# Altium PCB PCB1.PcbDoc
Units mm, origin at the board's own origin, x right, y up, seen from the top; angles counter-clockwise.
Board outline 60 x 50 mm, 2 copper layers (Top Layer, Bottom Layer); 19 components, 23 nets, 76 pads, 17 vias.
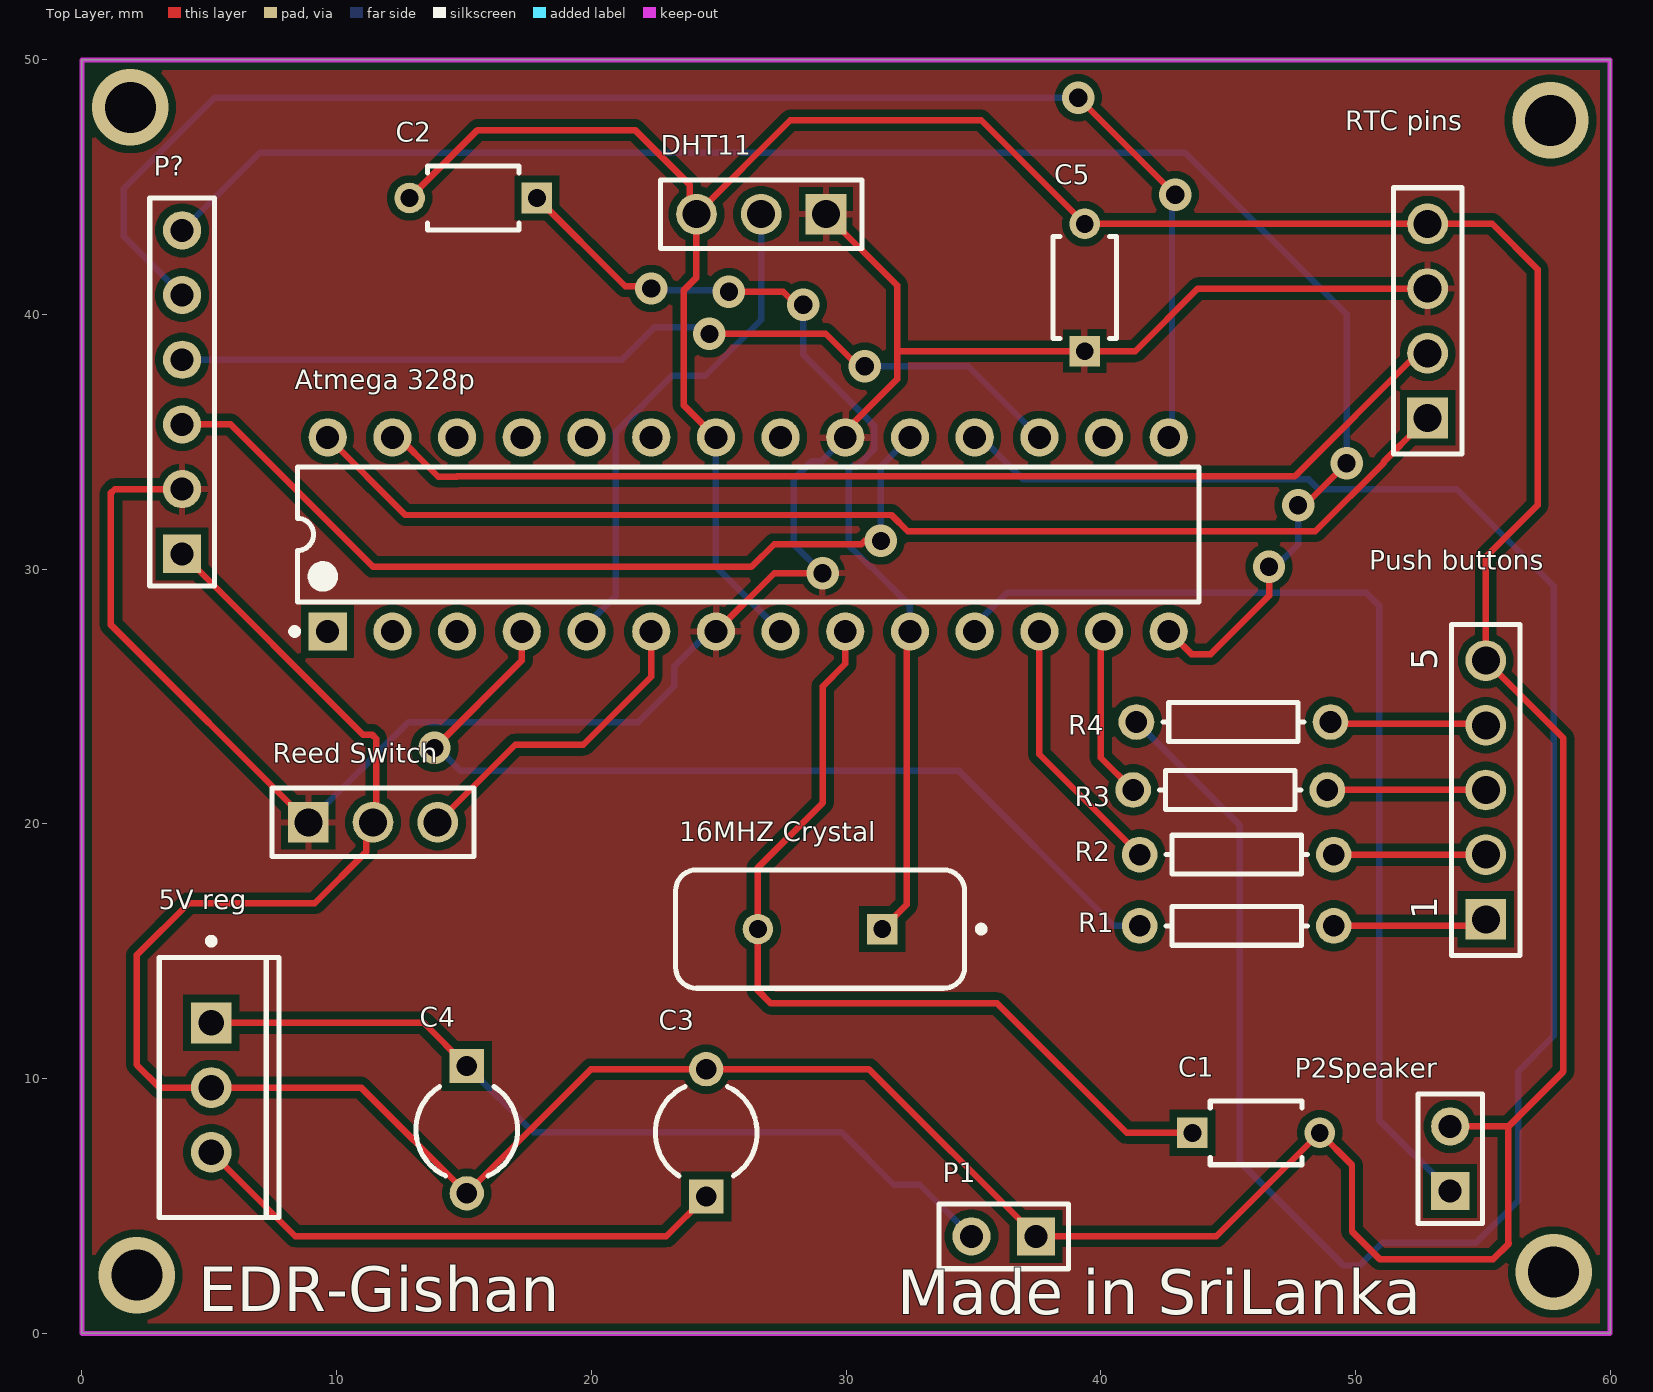
[diagram p0: Top Layer view]
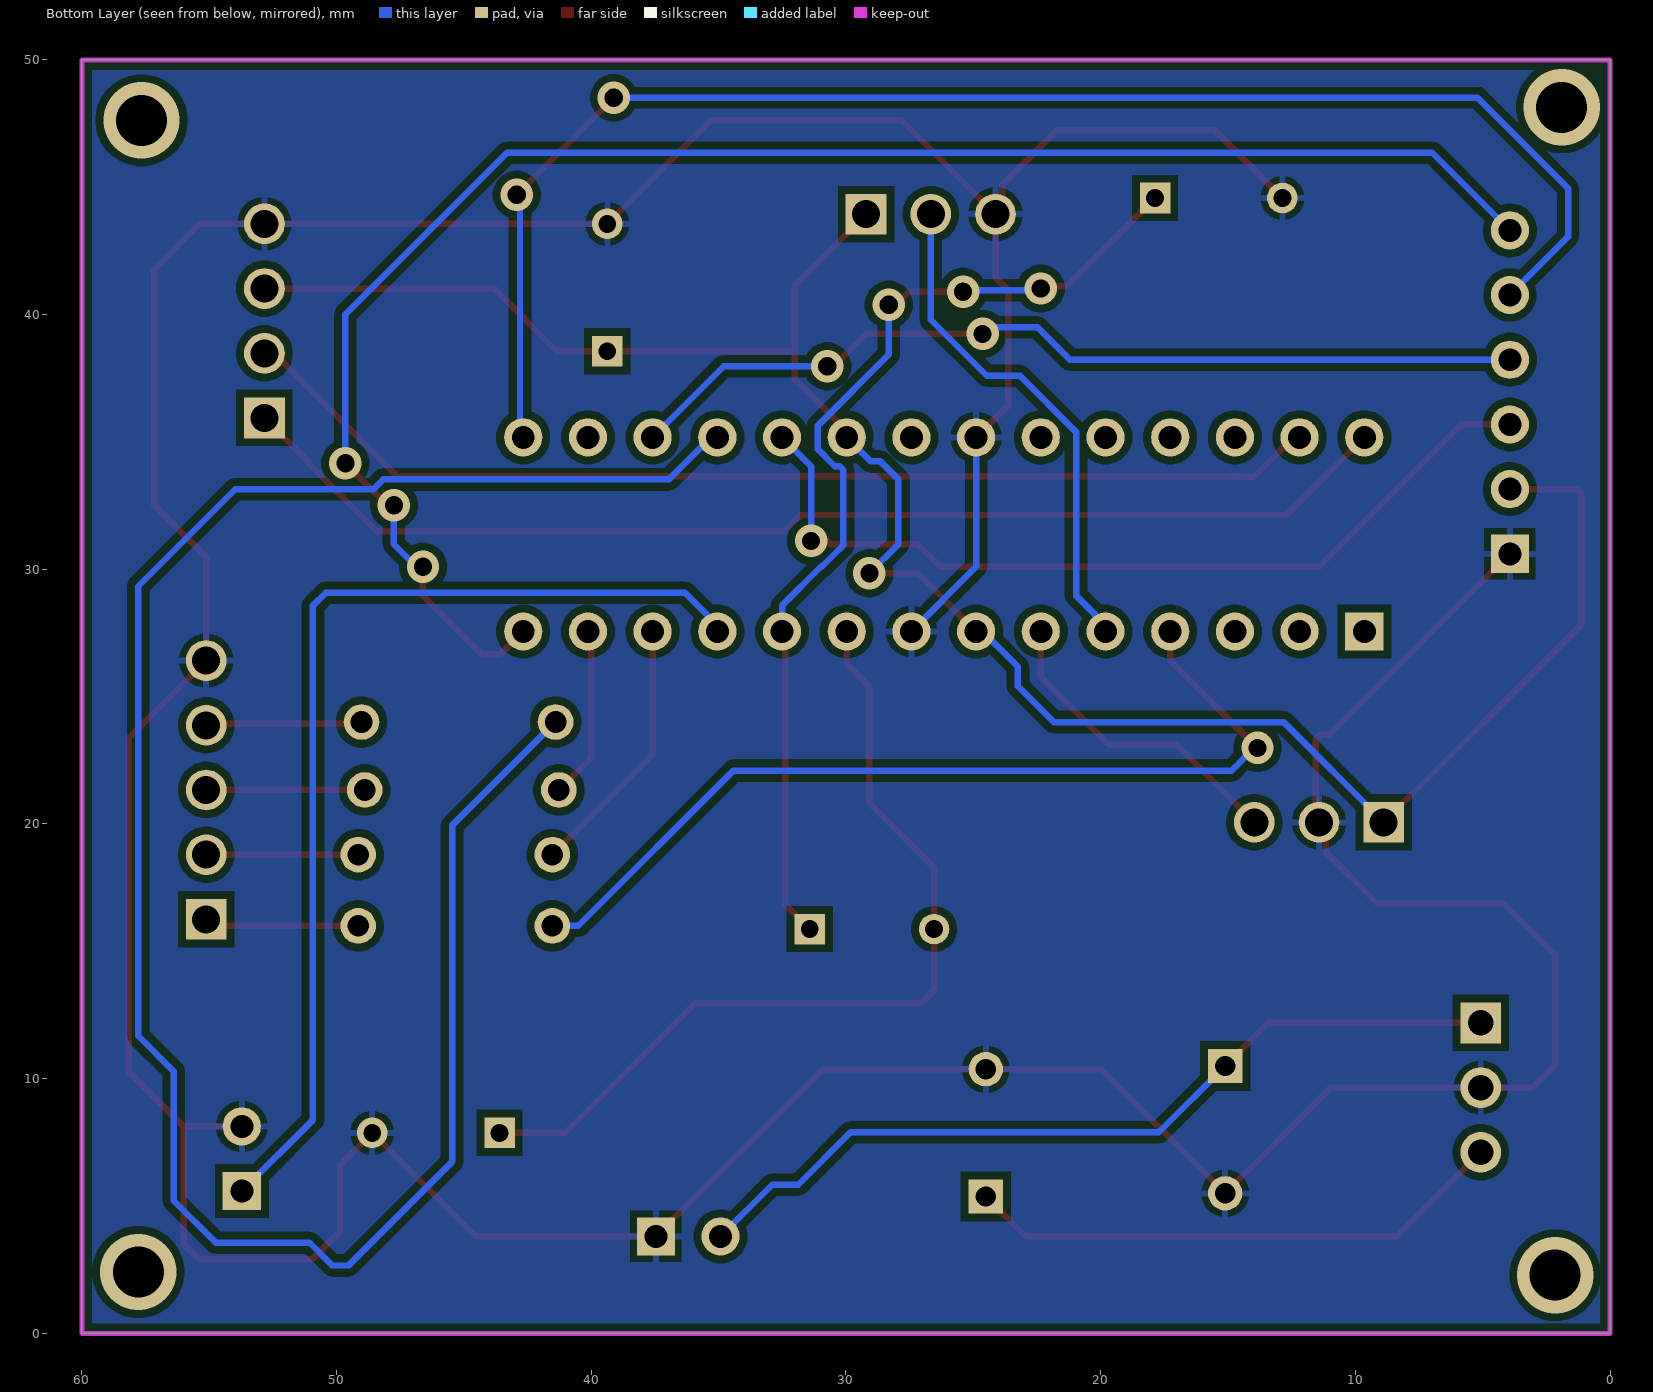
[diagram p1: Bottom Layer view, seen from below]

## Layer stack, top to bottom
Top Solder: solder mask 0.0102, Solder Resist, Dk 3.5
Top Layer: signal copper 0.0356
Dielectric 1: dielectric 0.32, FR-4, Dk 4.8
Bottom Layer: signal copper 0.0356
Bottom Solder: solder mask 0.0102, Solder Resist, Dk 3.5

## Board outline
0,0 60,0 60,50 0,50

## Design rules (kind name [scope] priority, off if disabled: settings)
Clearance "Polygon clearance" [InPolygon] p1: gap=0.3 ignorepadtopadclearanceinfootprint=FALSE except(0: Arc-Text Arc-Hole Track-Text Track-Hole SMDPad-Text SMDPad-Hole THPad-Text THPad-Hole Via-Text Via-Hole Fill-Text Fill-Hole Poly-Text Poly-Hole Region-Text Region-Hole Text-Text Text-Hole; 0.254: Arc-Arc Arc-Track Arc-SMDPad Arc-THPad Arc-Via Track-Track Track-SMDPad Track-THPad Track-Via SMDPad-SMDPad SMDPad-THPad SMDPad-Via THPad-THPad THPad-Via Via-Via)
Clearance [OnLayer('Top Solder') vs OnLayer('Top Overlay')] p2: gap=0.254 ignorepadtopadclearanceinfootprint=FALSE except(0: Arc-Text Arc-Hole Track-Text Track-Hole SMDPad-Text SMDPad-Hole THPad-Text THPad-Hole Via-Text Via-Hole Fill-Text Fill-Hole Poly-Text Poly-Hole Region-Text Region-Hole Text-Text Text-Hole)
PolygonConnect [All] p1: connectstyle=Relief reliefconductorwidth=0.254 reliefentries=4 polygonreliefangle="90 Angle" airgapwidth=0.254
RoutingVias [All] p1: holewidth=0.711 width=1.27 viastyle="Through Hole" minholewidth=0.711 minwidth=1.27 maxholewidth=0.711 maxwidth=1.27
SilkToSolderMaskClearance [IsPad] p1: minsilkscreentomaskgap=0.1 clearancetoexposedcopper=TRUE
SolderMaskExpansion [All] p1: expansion=0.102 istentingtop=FALSE
Width [All] p1: maxlimit=0.254 minlimit=0.254 preferedwidth=0.254
29 further rules are at their usual default settings.

## Components (designator, comment, footprint, x,y, rotation, side; value= is the part's Value field where it differs from the comment)
"5V reg" "LM7805CT" FAIR-TO-220-3 5.08,9.652 r0 top
"16MHZ Crystal" "FOXSLF/160-20" FOX-FOXSLF160-20 28.983,15.875 r180 top
"Atmega 328p" "ATmega328-PU" 28P3 26.162,31.369 r90 top
C1 "RCE5C1H220J0K1H03B" FP-RCE0K1-MFG 46.101,7.874 r0 top
C2 "RCE5C1H220J0K1H03B" FP-RCE0K1-MFG 15.367,44.577 r180 top
C3 "Cap2" CAPR5-4X5 24.511,7.874 r90 top value=100pF
C4 "Cap2" CAPR5-4X5 15.113,8.001 r270 top value=100pF
C5 "RDER71H104K0M1H03A" FP-RDE0M1-MFG 39.37,41.061 r90 top
DHT11 "61300311121" 61300311121 26.67,43.942 r180 top
P1 "Header 2" HDR1X2 37.465,3.81 r180 top
P2Speaker "Header 2" HDR1X2 53.721,5.588 r90 top
P? "Header 6" HDR1X6 3.937,30.607 r90 top
"Push buttons" "61300511121" 61300511121 55.118,21.336 r90 top
R1 "Res1" AXIAL-0.3 45.339,16.002 r0 top value=1K
R2 "Res1" AXIAL-0.3 45.339,18.796 r0 top value=1K
R3 "Res1" AXIAL-0.3 45.085,21.336 r0 top value=1K
R4 "1K" AXIAL-0.3 45.212,24.003 r0 top
"Reed Switch" "61300311121" 61300311121 11.43,20.066 r0 top
"RTC pins" "61300411121" 61300411121 52.832,39.751 r90 top

## Footprints (in the part's own frame and the unit in brackets; to place one, negate y for a bottom-side part, rotate by r counter-clockwise, add the part's x,y. Pads: shape width x height; smd on the part's side, far side on the other; paste and mask are expansions set on the pad)
28P3 [mm] "28-Pin Plastic Dual In-Line Package (PDIP)"
  rect 1.5x1.5 hole 0.9: 1(-3.81,16.51)
  round 1.5 hole 0.9: 2(-3.81,13.97) 3(-3.81,11.43) 4(-3.81,8.89) 5(-3.81,6.35) 6(-3.81,3.81) 7(-3.81,1.27) 8(-3.81,-1.27) 9(-3.81,-3.81) 10(-3.81,-6.35) 11(-3.81,-8.89) 12(-3.81,-11.43) 13(-3.81,-13.97) 14(-3.81,-16.51) 15(3.81,-16.51) 16(3.81,-13.97) 17(3.81,-11.43) 18(3.81,-8.89) 19(3.81,-6.35) 20(3.81,-3.81) 21(3.81,-1.27) 22(3.81,1.27) 23(3.81,3.81) 24(3.81,6.35) 25(3.81,8.89) 26(3.81,11.43) 27(3.81,13.97) 28(3.81,16.51)
  silkscreen extent -3.93,-17.7 2.65,17.93, body extent -3.6,-17.65 3.6,17.65, height 4.58
61300311121 [mm] "Pin Header, pitch 2.54 mm, THT, Vertical, single row, 3p"
  rect 1.6x1.6 hole 1.1: 1(-2.54,0)
  round 1.6 hole 1.1: 2(0,0) 3(2.54,0)
  silkscreen extent -3.96,-1.35 3.96,1.35, body extent -3.81,-1.27 3.81,1.27, height 8.57
61300411121 [mm] "Pin Header, pitch 2.54 mm, THT, Vertical, single row, 4p"
  rect 1.6x1.6 hole 1.1: 1(-3.81,0)
  round 1.6 hole 1.1: 2(-1.27,0) 3(1.27,0) 4(3.81,0)
  silkscreen extent -5.23,-1.35 5.23,1.35, body extent -5.08,-1.27 5.08,1.27, height 8.57
61300511121 [mm] "Pin Header, pitch 2.54 mm, THT, Vertical, single row, 5p"
  rect 1.6x1.6 hole 1.1: 1(-5.08,0)
  round 1.6 hole 1.1: 2(-2.54,0) 3(0,0) 4(2.54,0) 5(5.08,0)
  silkscreen extent -6.5,-1.35 6.5,1.35, body extent -6.35,-1.27 6.35,1.27, height 8.57
AXIAL-0.3 [mm] "Axial Device, Thru-Hole; 2 Leads; 0.3 in Pin Spacing"
  round 1.4 hole 0.85: 1(-3.81,0) 2(3.81,0)
  silkscreen extent -2.77,-0.76 2.77,0.76
CAPR5-4X5 [mm] "Capacitor; 2 Leads"
  rect 1.35x1.35 hole 0.8: 1(-2.5,0)
  round 1.35 hole 0.8: 2(2.5,0)
  silkscreen extent -1.69,-2 1.82,2
FAIR-TO-220-3 [mm] "FM, 3-Leads, Body 10.2x4.7mm, Pitch 2.54mm"
  rect 1.6x1.6 hole 1: 1(0,2.54)
  round 1.6 hole 1: 2(0,0) 3(0,-2.54)
  silkscreen extent -2.04,-5.1 2.66,5.87, body extent -2.04,-5.1 2.66,5.1, height 18.95
FOX-FOXSLF160-20 [mm] "THD, 2-Leads, Body 11.35x4.65mm"
  rect 1.2x1.2 hole 0.7: 1(-2.44,0)
  round 1.2 hole 0.7: 2(2.44,0)
  silkscreen extent -6.45,-2.32 5.68,2.32, body extent -5.67,-2.32 5.68,2.33, height 3.6
FP-RCE0K1-MFG [mm]
  rect 1.2x1.2 hole 0.7 paste-1000 mask+0: 1(-2.5,0)
  round 1.2 hole 0.7 paste-1000 mask+0: 2(2.5,0)
  silkscreen extent -1.8,-1.25 1.8,1.25, body extent -3.2,-1.35 3.2,1.35, height 0.25
FP-RDE0M1-MFG [mm]
  rect 1.2x1.2 hole 0.7 paste-1000 mask+0: 1(-2.5,0)
  round 1.2 hole 0.7 paste-1000 mask+0: 2(2.5,0)
  silkscreen extent -2,-1.25 2,1.25, body extent -3.2,-1.35 3.2,1.35, height 0.25
HDR1X2 [mm] "Connector; Header; 2 Position"
  rect 1.5x1.5 hole 0.9: 1(0,0)
  round 1.5 hole 0.9: 2(2.54,0)
  silkscreen extent -1.27,-1.27 3.81,1.27
HDR1X6 [mm] "Connector; Header; 6 Position"
  rect 1.5x1.5 hole 0.9: 1(0,0)
  round 1.5 hole 0.9: 2(2.54,0) 3(5.08,0) 4(7.62,0) 5(10.16,0) 6(12.7,0)
  silkscreen extent -1.27,-1.27 13.97,1.27

## Part data
"5V reg": library part CMP-2000-04938-1, "Positive Voltage Regulator, 5 V, 1 A, -40 to 125 degC, 3-Pin TO-220, RoHS, Tube", Manufacturer=FairchildSemiconductor, Maximum Input Voltage=35V, Maximum Output Current=2.2(Typ)A, Maximum Quiescent Current=8mA, Operating Temperature=-40to125degC, Output Voltage=5V, Package=3TO-220AB, Package Description="3-Pin Through Hole Device, Body 10 x 4.5 mm, Pitch 2.54 mm", Package Reference=TO-220, Typical Dropout Voltage @ Current=2@1AV, Accuracy=±4%, Category=LinearRegulator, Datasheet URL=https://datasheet.ciiva.com/26904/lm7805ct-26904988.pdf, Datasheet Version=Aug-12, Line Regulation=100mV, Load Regulation=100mV, Manufacturer URL=https://www.fairchildsemi.com/, Mounting=ThroughHole, Number of Outputs=1, Output Type=Fixed, Package URL=https://www.fairchildsemi.com/package-drawings/TO/TO220B03.pdf, Packaging=Rail/Tube, Polarity=Positive, Rad Hard=No, Type=Linear
"16MHZ Crystal": library part CMP-1749-00003-1, "Resistance Weld Thru-Hole Crystal, 16 MHz, -20 to 70 degC, 2-Pin THD, RoHS, Bulk", Case\Package=Axial, Max Operating Temperature="155 degC", Min Operating Temperature="-55 degC", Package Quantity=200, Power Rating="250 mW", Resistance="221 kohm", Tolerance=1%, Voltage Rating="250 V", ComponentLink1Description="Manufacturer URL", ComponentLink1URL=http://www.foxonline.com/, ComponentLink2Description=Datasheet, ComponentLink2URL=http://www.foxonline.com/pdfs/hc49slf.pdf, DatasheetVersion=Mar-15, Length="0.248 inch", Mount="Through Hole", PackageDescription="2-Pin Through Hole Device, Body 11.35 x 4.65 mm", PackageReference=FOXSLF160-20, Packaging=Bulk, RoHSCompliant=true
"Atmega 328p": library part CMP-0095-00015-2, "8-bit AVR Microcontroller, 32KB Flash, 1KB EEPROM, 2KB SRAM, 28-pin PDIP, Industrial Grade (-40°C to 85°C)", ComponentLink1Description="Manufacturer URL", ComponentLink1URL=http://www.atmel.com/, ComponentLink2Description="ATmega48A/48PA/88A/88PA/168A/168PA/328/328P Datasheet", ComponentLink2URL=http://www.atmel.com/dyn/resources/prod_documents/8271.pdf, ComponentLink3Description="ATmega48A/48PA/88A/88PA/168A/168PA/328/328P Summary", ComponentLink3URL=http://www.atmel.com/dyn/resources/prod_documents/8271S.pdf, DatasheetVersion="revD, May-2011", PackageDescription="28-lead (0.300\"/7.62mm Wide) Plastic Dual Inline Package (PDIP)", PackageReference=28P3, PackageVersion="revB, Sep-2001", RevisionNote="DatasheetVersion updated. URLs added."
C1 C2: library part CMP-06035-047580-1, "Cap Ceramic 22pF 50V C0G ±5% Radial 5mm +125°C Automotive Bulk", Capacitance=22pF, Case/Package=Radial, Dielectric=C0G, Max Operating Temperature=125°C, Min Operating Temperature=-55°C, Package Quantity=500, Ratings=AEC-Q200, Resistor Type=Ceramic, Tolerance=5%, Voltage Rating=50V, Height=3.5mm, Height - Seated (Max)=0.138inch, Lead Diameter=0.5mm, Lead Pitch=0.197inch, Lead/Base Style="Formed Leads", Length=0.142inch, Mount="Through Hole", Packaging=Bulk, Termination=Radial, Voltage Rating (DC)=50V, Width=0.098inch
C3 C4: "Capacitor", PackageDescription="Capacitor; 2 Leads", PackageReference=CAPR5-4X5, Published=23-Sep-2002, Publisher="Altium Limited"
C5: library part CMP-06035-051680-1, "Ceramic Capacitor 100nF ±10% 50V X7R Radial", Capacitance=100nF, Case/Package=Radial, Dielectric=X7R, Max Operating Temperature=125°C, Min Operating Temperature=-55°C, Package Quantity=2000, Resistor Type=Ceramic, Tolerance=10%, Voltage Rating=50V, Height=3.5mm, Height - Seated (Max)=0.236inch, Lead Diameter=0.5mm, Lead Free="Lead Free", Lead Pitch=0.197inch, Lead/Base Style=Kinked, Length=0.157inch, Mount="Through Hole", Packaging="Tape and Reel", Termination=Radial, Voltage Rating (DC)=50V, Width=3.5mm
DHT11 "Reed Switch": library part CMP-1502-01062-1, "THT Vertical Pin Header WR-PHD, Pitch 2.54 mm, Single Row, 3 pins", Contact Resistance=20mOhm, Manufacturer="Wurth Elektronik", Operating Temperature=-40to105degC, Rated Current=3A, Withstanding Voltage=500VAC, Working Voltage=250VAC, Datasheet URL=https://katalog.we-online.de/em/datasheet/6130xx11121.pdf, Gender=Male, Manufacturer URL=http://www.we-online.de, Mounting Technology=THT, Orientation=Vertical, Package Reference=61300311121, Packaging=Bag, Part Number=61300311121, Pin Number=3, Pitch=2.54mm, Publisher=WurthElektronik, Row Number=Single
P1 P2Speaker: "Header, 2-Pin", LatestRevisionDate=17-Jul-2002, LatestRevisionNote="Re-released for DXP Platform.", Publisher="Altium Limited"
P?: "Header, 6-Pin", LatestRevisionDate=17-Jul-2002, LatestRevisionNote="Re-released for DXP Platform.", Publisher="Altium Limited"
"Push buttons": library part CMP-1502-01068-1, "THT Vertical Pin Header WR-PHD, Pitch 2.54 mm, Single Row, 5 pins", Contact Resistance=20mOhm, Manufacturer="Wurth Elektronik", Operating Temperature=-40to105degC, Rated Current=3A, Withstanding Voltage=500VAC, Working Voltage=250VAC, Datasheet URL=https://katalog.we-online.de/em/datasheet/6130xx11121.pdf, Gender=Male, Manufacturer URL=http://www.we-online.de, Mounting Technology=THT, Orientation=Vertical, Package Reference=61300511121, Packaging=Bag, Part Number=61300511121, Pin Number=5, Pitch=2.54mm, Publisher=WurthElektronik, Row Number=Single
R1 R2 R3: "Resistor", LatestRevisionDate=17-Jul-2002, LatestRevisionNote="Re-released for DXP Platform.", PackageDescription="Axial Device, Thru-Hole; 2 Leads; 0.3 in Pin Spacing", PackageReference=AXIAL-0.3, Published=8-Jun-2000, Publisher="Altium Limited"
R4: library part Res1, "Resistor", LatestRevisionDate=17-Jul-2002, LatestRevisionNote="Re-released for DXP Platform.", PackageDescription="Axial Device, Thru-Hole; 2 Leads; 0.3 in Pin Spacing", PackageReference=AXIAL-0.3, Published=8-Jun-2000, Publisher="Altium Limited"
"RTC pins": library part CMP-1502-01064-1, "THT Vertical Pin Header WR-PHD, Pitch 2.54 mm, Single Row, 4 pins", Contact Resistance=20mOhm, Manufacturer="Wurth Elektronik", Operating Temperature=-40to105degC, Rated Current=3A, Withstanding Voltage=500VAC, Working Voltage=250VAC, Datasheet URL=https://katalog.we-online.de/em/datasheet/6130xx11121.pdf, Gender=Male, Manufacturer URL=http://www.we-online.de, Mounting Technology=THT, Orientation=Vertical, Package Reference=61300411121, Packaging=Bag, Part Number=61300411121, Pin Number=4, Pitch=2.54mm, Publisher=WurthElektronik, Row Number=Single

## Via types
v1: diameter 1.27, hole 0.711, Top Layer to Bottom Layer, 13 vias
v2: diameter 3, hole 2, Top Layer to Bottom Layer, 4 vias

## Nets (pads, with @x,y where several pads share a name; then routed paths per layer and width w, separated by ;. In a path a pad name is that pad's centre, name@x,y a point inside that pad or via, vN(x,y) a via of type N, cw(c..) or ccw(c..) an arc to the next point about the centre after c; other vN are vias at no path point)
"5V net": "Atmega 328p.7" "Atmega 328p.20" "Reed Switch.1" "RTC pins.3" C5.1 DHT11.1 P?.2 | length 82.7
  Top Layer w0.254: P?.2 1.292,33.147 1.143,32.998 1.143,27.813 8.89,20.066 ; 24.892,27.559 27.178,29.845 v1(29.083,29.845) ; DHT11.1 32.004,41.148 32.004,38.608 ; 29.972,35.433 32.004,37.465 32.004,38.608 ; 52.451,41.021 43.815,41.021 41.355,38.561 C5.1 32.051,38.561 32.004,38.608
  Bottom Layer w0.254: 8.89,20.066 12.827,24.003 21.844,24.003 23.249,25.408 23.249,26.17 24.892,27.813 ; v1(29.083,29.845) 27.94,30.988 27.94,33.528 28.646,34.234 29.027,34.234 29.972,35.179
GND: "5V reg.2" "Atmega 328p.8" "Atmega 328p.22" "Push buttons.5" "Reed Switch.2" "RTC pins.4" C1.2 C2.2 C3.2 C4.2 C5.2 DHT11.3 P1.1 P2Speaker.2 P?.1 | length 209.3
  Top Layer w0.254: P?.1 11.049,23.495 11.408,23.495 11.557,23.346 11.557,20.193 11.43,20.066 11.172,19.808 11.172,18.919 9.144,16.891 4.191,16.891 2.159,14.859 2.159,10.541 3.048,9.652 5.08,9.652 10.962,9.652 C4.2 19.986,10.374 C3.2 30.901,10.374 P1.1 44.537,3.81 C1.2 49.865,6.61 49.865,4.004 50.949,2.921 55.416,2.921 56.029,3.534 56.007,3.556 56.007,8.128 ; C2.2 15.534,47.244 21.717,47.244 23.872,45.089 23.872,44.2 DHT11.3 ; 24.892,35.433 24.638,35.433 23.622,36.449 23.622,40.946 24.13,41.454 DHT11.3 ; P2Speaker.2 56.007,8.128 ; DHT11.3 27.813,47.625 35.306,47.625 C5.2 52.451,43.561 55.372,43.561 57.15,41.783 57.15,32.512 55.118,30.48 55.118,26.416 58.166,23.368 58.166,10.287 56.007,8.128
  Bottom Layer w0.254: 24.892,35.179 24.892,30.099 27.432,27.559
MOSI: "Atmega 328p.17" P?.4 | length 36.5
  Top Layer w0.254: v1(24.638,39.243) 29.21,39.243 30.48,37.973 v1(30.734,37.973)
  Bottom Layer w0.254: P?.4 21.209,38.227 22.479,39.497 24.892,39.497 v1(24.638,39.243) ; v1(30.734,37.973) 34.798,37.973 37.592,35.179
"Net5V reg_1": "5V reg.1" C4.1 P1.2 | length 33.3
  Top Layer w0.254: 5.08,12.192 13.422,12.192 C4.1
  Bottom Layer w0.254: C4.1 17.717,7.898 29.821,7.898 31.877,5.842 32.893,5.842 P1.2
"Net5V reg_3": "5V reg.3" C3.1 | length 21.4
  Top Layer w0.254: 5.08,7.112 8.382,3.81 22.947,3.81 C3.1
"Net16MHZ Crystal_1": "16MHZ Crystal.1" "Atmega 328p.10" C2.1 | length 39.9
  Top Layer w0.254: C2.1 21.336,41.108 22.265,41.108 v1(22.352,41.021) ; v1(25.4,40.894) 27.538,40.894 28.046,40.386 v1(28.321,40.386) ; 31.423,15.875 32.385,16.837 32.385,27.559 32.512,27.559
  Bottom Layer w0.254: v1(22.352,41.021) 22.415,40.957 25.336,40.957 v1(25.4,40.894) ; v1(28.321,40.386) 28.321,38.429 31.103,35.647 31.103,34.711 30.44,34.048 30.248,34.048 30.112,33.912 30.112,30.936 30.46,30.587 30.948,30.099 30.988,30.099 32.512,28.575 32.512,27.559
"Net16MHZ Crystal_2": "16MHZ Crystal.2" "Atmega 328p.9" C1.1 | length 34.9
  Top Layer w0.254: 29.972,27.559 29.972,26.289 29.083,25.4 29.083,20.828 26.543,18.288 26.543,15.875 26.543,13.462 27.051,12.954 35.941,12.954 41.021,7.874 C1.1
"NetAtmega 328p_11": "Atmega 328p.11" P2Speaker.1 | length 40.8
  Bottom Layer w0.254: 35.052,27.813 36.322,29.083 50.419,29.083 50.927,28.575 50.927,8.382 P2Speaker.1
"NetPush buttons_1": "Push buttons.1" R1.2 | length 6.1
  Top Layer w0.254: R1.2 54.864,16.002 55.118,16.256
"NetPush buttons_2": "Push buttons.2" R2.2 | length 6
  Top Layer w0.254: R2.2 55.118,18.796
"NetPush buttons_3": "Push buttons.3" R3.2 | length 6.2
  Top Layer w0.254: R3.2 55.118,21.336
"NetPush buttons_4": "Push buttons.4" R4.2 | length 6.1
  Top Layer w0.254: R4.2 49.085,23.939 55.054,23.939 55.118,23.876
PB0: "Atmega 328p.14" P?.6 | length 67.5
  Top Layer w0.254: 42.672,27.559 42.861,27.37 42.885,27.346 43.561,26.67 44.323,26.67 46.609,28.956 v1(46.609,30.099) ; v1(47.752,32.512) 48.006,32.512 v1(49.657,34.163)
  Bottom Layer w0.254: P?.6 6.985,46.355 43.307,46.355 49.657,40.005 v1(49.657,34.163) ; v1(46.609,30.099) 46.863,30.099 47.752,30.988 v1(47.752,32.512)
PB1: "Atmega 328p.15" P?.5 | length 59.1
  Top Layer w0.254: v1(39.116,48.514) v1(42.926,44.704)
  Bottom Layer w0.254: P?.5 1.651,43.053 1.651,44.958 5.207,48.514 v1(39.116,48.514) ; 42.672,35.179 42.799,35.306 42.799,44.577 v1(42.926,44.704)
PB4: "Atmega 328p.18" R4.1 | length 82.7
  Top Layer w0.254: R4.1@41.402,23.876 R4.1
  Bottom Layer w0.254: 35.052,35.433 36.957,33.528 48.173,33.528 48.554,33.147 53.975,33.147 57.785,29.337 57.785,11.684 56.388,10.287 56.388,5.207 54.737,3.556 51.054,3.556 50.165,2.667 49.53,2.667 45.466,6.731 45.466,19.939 R4.1
PD2: "Atmega 328p.4" R1.1 | length 36.8
  Top Layer w0.254: v1(13.843,22.987) 17.263,26.407 17.263,27.804 17.272,27.813
  Bottom Layer w0.254: v1(13.843,22.987) 13.97,22.987 14.859,22.098 34.417,22.098 40.513,16.002 R1.1
PD3: "Atmega 328p.5" DHT11.2 | length 19.7
  Bottom Layer w0.254: 19.812,27.813 20.967,28.968 20.967,35.393 23.168,37.594 24.469,37.594 26.67,39.795 DHT11.2
PD4: "Atmega 328p.6" "Reed Switch.3" | length 12.8
  Top Layer w0.254: 13.97,20.066 17.018,23.114 19.685,23.114 22.352,25.781 22.352,27.813
PD6: "Atmega 328p.12" R2.1 | length 10.6
  Top Layer w0.254: 37.592,27.813 37.592,22.733 R2.1
PD7: "Atmega 328p.13" R3.1 | length 7
  Top Layer w0.254: 40.132,27.559 40.005,27.432 40.005,22.606 R3.1 ; 40.132,27.813 40.303,27.813
SCK: "Atmega 328p.19" P?.3 | length 34.7
  Top Layer w0.254: P?.3 5.842,35.687 11.43,30.099 26.289,30.099 27.178,30.988 30.607,30.988 30.734,31.115 v1(31.369,31.115)
  Bottom Layer w0.254: v1(31.369,31.115) 31.369,34.036 32.512,35.179
SCL: "Atmega 328p.28" "RTC pins.1" | length 46.4
  Top Layer w0.254: 9.652,35.179 12.7,32.131 31.79,32.131 32.425,31.496 48.427,31.496 51.118,34.188 51.118,34.227 52.451,35.56 52.451,35.941
SDA: "Atmega 328p.27" "RTC pins.2" | length 43
  Top Layer w0.254: 12.192,35.433 13.992,33.633 14.71,33.633 14.732,33.655 47.625,33.655 52.451,38.481
pads on no net: "Atmega 328p.1" "Atmega 328p.2" "Atmega 328p.3" "Atmega 328p.16" "Atmega 328p.21" "Atmega 328p.23" "Atmega 328p.24" "Atmega 328p.25" "Atmega 328p.26"
copper on no net:
  other v2: 2.159,2.286 57.785,2.413 57.658,47.625 1.905,48.133

## Polygon pours and split planes (outlines as drawn)
"5V net" on Top Layer "5V_NET_L01_P001" (solid, pour order 1): 0.127,49.911 59.944,49.911 59.944,0.127 0.127,0.127 0.127,0.888
GND on Bottom Layer "GND_L02_P000" (solid, pour order 0): 0.127,49.911 59.944,49.911 59.944,0.127 0.127,0.127 0.127,0.381

## Keep-outs
Keep-Out Layer:
  the board outline again, w0.2

## Silkscreen, mask and mechanical layers (free items; w line width, h text height)
Top Overlay:
  text "EDR-Gishan" at 4.572,0.287 h3
  text "Made in SriLanka" at 32.004,0.16 h3

## Text inside footprints (layer, text, board x,y; h text height)
"Push buttons": Top Overlay "1" at 53.213,16.256 h1.02 r90; Top Overlay "5" at 53.213,26.035 h1.02 r90